# EAGLE board Reserve_nutzen (EAGLE 6.5.0)
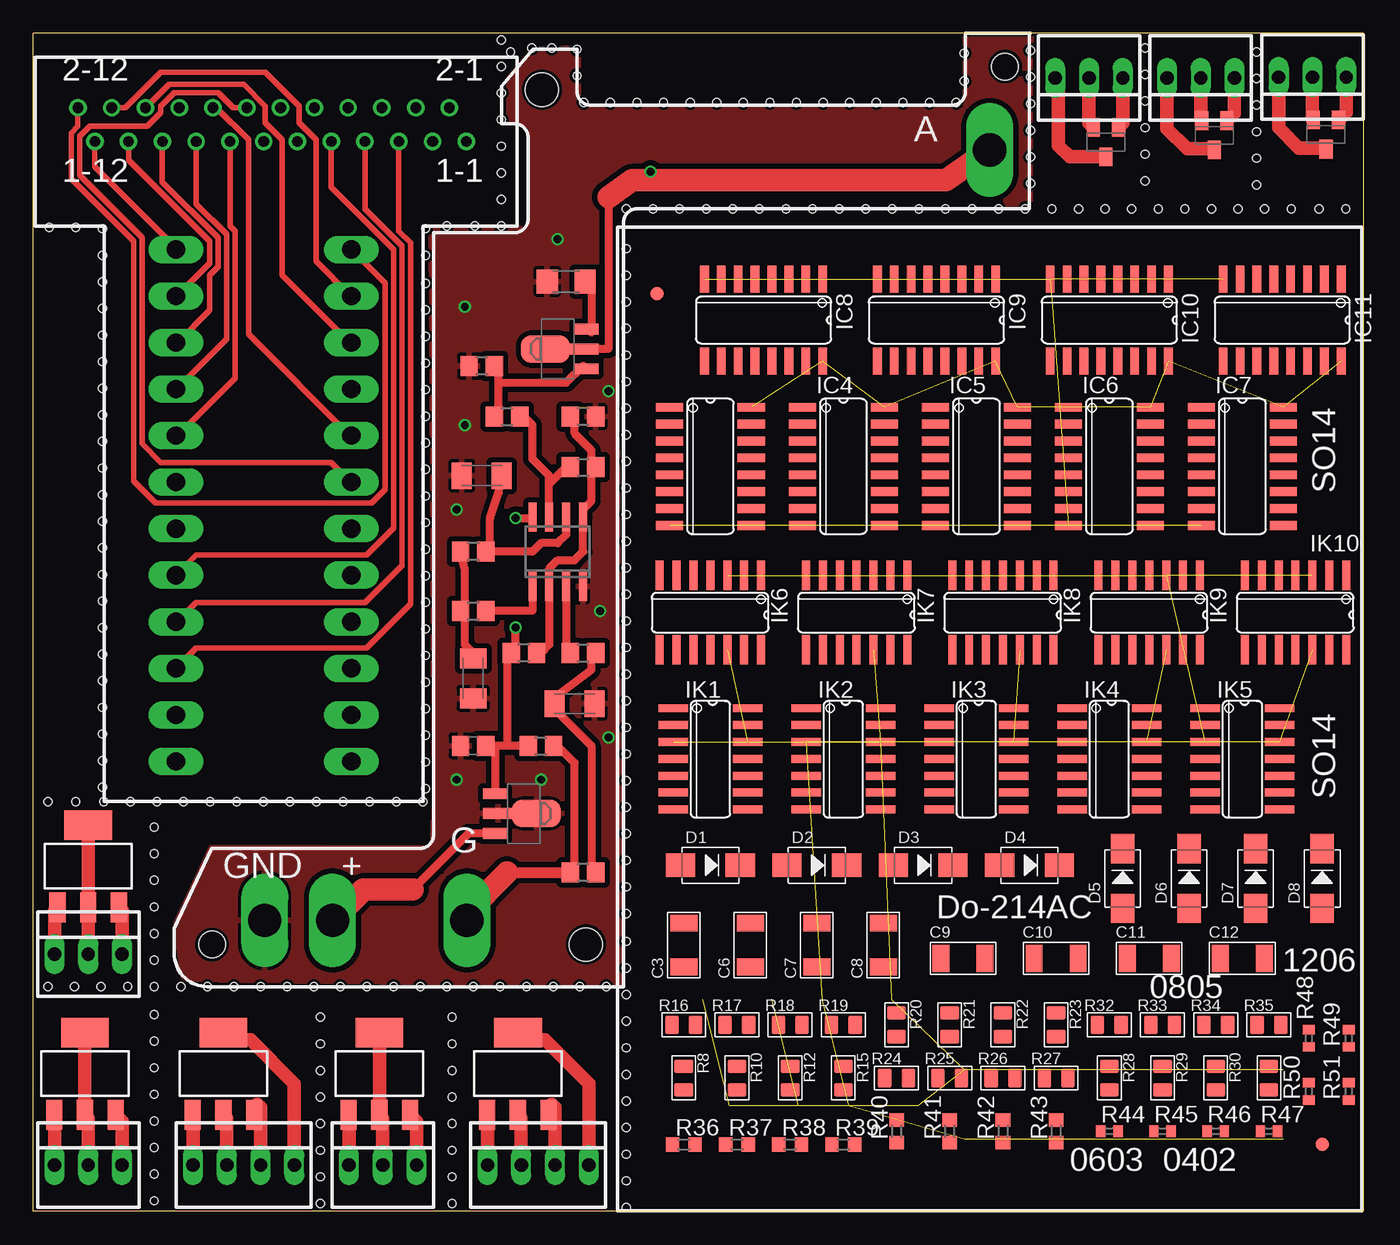
[diagram p0: board, top side]
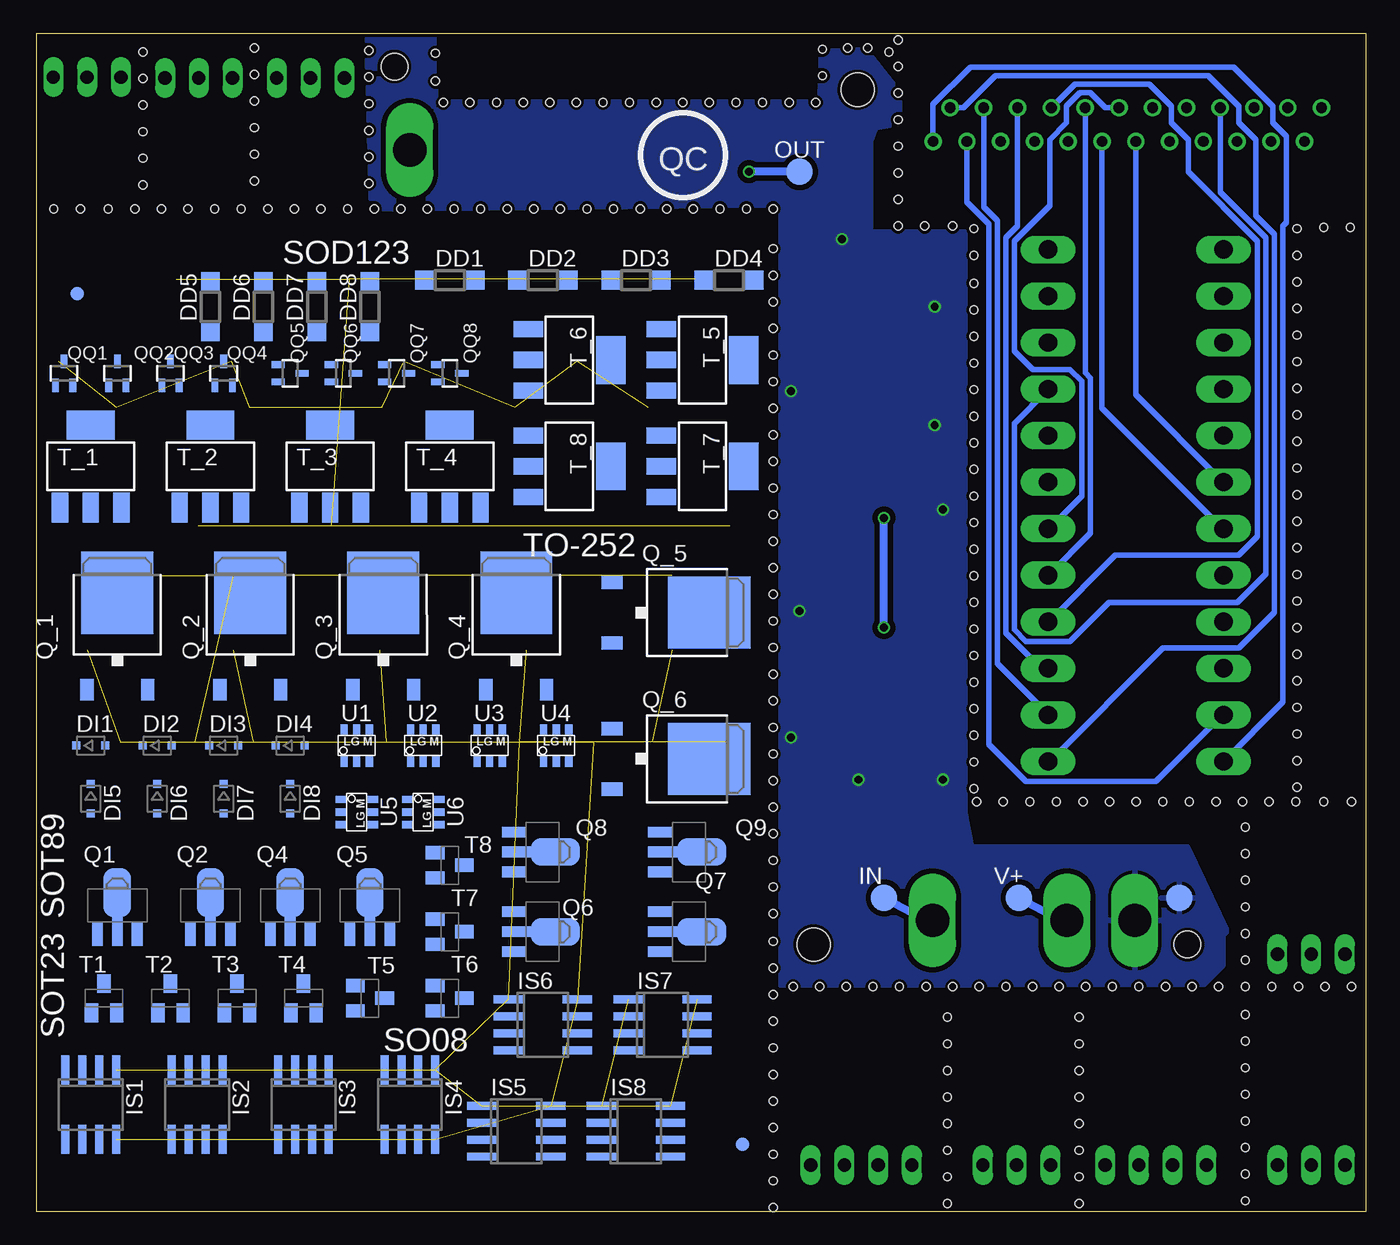
[diagram p1: board, bottom side, seen from below]

Size 100 x 88.6 mm. Coordinates in mm from the lower left corner, seen from the top.
Outline: 100,88.6 100,0 0,0 0,88.6 100,88.6
Copper layers (1*16): Top 0.035mm / dielectric 1.5mm / Bottom 0.035mm
Design rules "SeeedStudio_2layer_DRU_no_angle_20140221 *": minimum track width 24mil, minimum drill 12mil, track to track 0.4mm, track to pad 0.4mm, pad to pad 0.4mm, via to via 0.4mm, smd to smd 0mil, copper to edge 10mil, drill to drill 10mil, minimum pad ring 10mil, minimum via ring 6mil, stop-mask expansion 2mil, vias tented up to drill 100mil, thermal gap 10mil
Holes 2.5 mm at 41.56,20.07 38.25,84.35
Holes 2 mm at 73.08,86.09 13.44,20.07
Holes 0.6 mm at 5.2,31.9 5.2,33.9 5.2,35.9 5.2,37.9 5.2,39.9 5.2,41.9 5.2,43.9 5.2,45.9 5.2,47.9 5.2,49.9 5.2,51.9 5.2,53.9 5.2,55.9 5.2,57.9 5.2,59.9 5.2,61.9 5.2,63.9 5.2,65.9 5.2,67.9 5.2,69.9 5.2,71.9 5.2,73.9 44.6,75.4 46.6,75.4 48.6,75.4 50.6,75.4 52.6,75.4 54.6,75.4 56.6,75.4 58.6,75.4 60.6,75.4 62.6,75.4 64.6,75.4 66.6,75.4 68.6,75.4 70.6,75.4 72.6,75.4 74.6,75.4 76.6,75.4 78.6,75.4 80.6,75.4 82.6,75.4 84.6,75.4 86.6,75.4 88.6,75.4 90.6,75.4 92.6,75.4 94.6,75.4 96.7,75.4 98.7,75.4 41.4,83.4 43.4,83.4 45.4,83.4 47.4,83.4 49.4,83.4 51.4,83.4 53.4,83.4 55.4,83.4 57.4,83.4 59.4,83.4 61.4,83.4 63.4,83.4 65.4,83.4 67.4,83.4 69.4,83.4 31.5,0.6 31.5,2.6 31.5,4.6 31.5,6.6 31.5,8.6 31.5,10.6 31.5,12.6 31.5,14.6 44.6,0.3 44.6,2.3 44.6,4.3 44.6,6.3 44.6,8.3 44.6,10.3 44.6,12.3 44.6,14.3 44.6,16.3 44.6,18.3 44.6,20.3 44.6,22.4 44.6,24.4 44.6,26.4 44.6,28.4 44.6,30.4 44.6,32.4 44.6,34.4 44.6,36.4 44.6,38.4 44.6,40.4 44.6,42.4 44.6,44.4 44.6,46.4 44.6,48.4 44.6,50.4 44.6,52.4 44.6,54.4 44.6,56.4 44.6,58.4 44.6,60.4 44.6,62.4 44.6,64.4 44.6,66.4 44.6,68.4 44.6,70.4 44.6,72.4 1.1,16.9 3.1,16.9 5.1,16.9 7.1,16.9 9.1,16.9 11.1,16.9 13.1,16.9 15.1,16.9 17.1,16.9 19.1,16.9 21.1,16.9 23.1,16.9 25.1,16.9 27.1,16.9 29.1,16.9 31.1,16.9 33.1,16.9 35.1,16.9 37.1,16.9 39.1,16.9 41.1,16.9 43.1,16.9 5.3,30.8 7.3,30.8 9.3,30.8 11.3,30.8 13.3,30.8 15.3,30.8 17.3,30.8 19.3,30.8 21.3,30.8 23.3,30.8 25.3,30.8 27.3,30.8 29.3,30.8 29.5,31.8 29.5,33.8 29.5,35.8 29.5,37.8 29.5,39.8 29.5,41.8 29.5,43.8 29.5,45.8 29.5,47.8 29.5,49.8 29.5,51.8 29.5,53.8 29.5,55.8 29.5,57.8 29.5,59.8 29.5,61.8 29.5,63.8 29.5,65.8 29.5,67.8 29.5,69.8 29.5,71.9 29.5,73.9 35.2,74.1 35.2,76.1 35.2,78.1 35.2,80.1 35.2,82.1 35.2,84.1 35.2,86.1 35.2,88.1 1.2,74 3.2,74 21.6,0.6 21.6,2.6 21.6,4.6 21.6,6.6 21.6,8.6 21.6,10.6 21.6,12.6 21.6,14.6 9.1,0.8 9.1,2.8 9.1,4.8 9.1,6.8 9.1,8.8 9.1,10.8 9.1,12.8 9.1,14.8 9.1,18.9 9.1,20.9 9.1,22.9 9.1,24.9 9.1,26.9 9.1,28.9 3.2,30.8 1.1,30.8 83.6,77.5 83.6,79.5 83.6,81.5 83.6,83.5 83.6,85.5 83.6,87.5 92,77.2 92,79.2 92,81.2 92,83.2 92,85.2 92,87.2 75,77.3 75,79.3 75,81.3 75,83.3 75,85.3 75,87.3 70,85 70,87.1 40.9,85.4 40.9,87.4 39,87.5 37.5,87.5 35.9,87.2 33.2,74.1 31.1,74.1

## Footprints (pad centres in the part's own frame; a part is rotated, then mirrored left to right if it is on the bottom)
ID2.5MM = drill 2.5 long: P$1 0,0
C1206K = smd 1.5 x 2: 1 -1.5,0; 2 1.5,0
C1206 = smd 1.27 x 2.032: 1 -1.651,0; 2 1.651,0
C0805 = smd 1.3 x 1.5: 1 -0.95,0; 2 0.95,0
DO-214AC = smd 2.2 x 1.77: 1 -2.242,0; 2 2.242,0
SOD123 = smd 1.4 x 1.4: A 1.9,0; C -1.9,0
SOD323-R = smd 0.6 x 0.6: A 1.1,0; C -1.1,0
FIDUCIAL_1MM = smd 1 x 1: 1 0,0
B2.0 = smd 2 x 2: TP 0,0
SO08 = smd 0.6 x 2.2: 1 -1.905,-2.6; 2 -0.635,-2.6; 3 0.635,-2.6; 4 1.905,-2.6; 5 1.905,2.6; 6 0.635,2.6; 7 -0.635,2.6; 8 -1.905,2.6
SOT89_ROUND = smd 0.8 x 1.8: 1 -1.499,-2.181; 3 1.499,-2.181 | smd 0.8 x 2.3: 2 0,-1.927 | smd 2.032 x 3.65: 2@1 0,0.94
SO16 = smd 0.66 x 2.032: 1 -4.445,-3.073; 2 -3.175,-3.073; 3 -1.905,-3.073; 4 -0.635,-3.073; 5 0.635,-3.073; 6 1.905,-3.073; 7 3.175,-3.073; 8 4.445,-3.073; 9 4.445,3.073; 10 3.175,3.073; 11 1.905,3.073; 12 0.635,3.073; 13 -0.635,3.073; 14 -1.905,3.073; 15 -3.175,3.073; 16 -4.445,3.073
SO14 = smd 0.6 x 2.2: 1 -3.81,-2.8; 2 -2.54,-2.8; 3 -1.27,-2.8; 4 0,-2.8; 5 1.27,-2.8; 6 2.54,-2.8; 7 3.81,-2.8; 8 3.81,2.8; 9 2.54,2.8; 10 1.27,2.8; 11 0,2.8; 12 -1.27,2.8; 13 -2.54,2.8; 14 -3.81,2.8
SOT89 = smd 0.8 x 1.8: 1 -1.499,-2.181; 3 1.499,-2.181 | smd 0.8 x 2.3: 2 0,-1.927 | smd 2.032 x 3.65: 2@1 0,0.94
SOT223 = smd 1.219 x 2.235: 1 -2.311,-3.099; 2 0,-3.099; 3 2.311,-3.099 | smd 3.6 x 2.2: 4 0,3.099
SOT23-BEC = smd 1 x 1.4: B -0.95,-1.1; C 0,1.1; E 0.95,-1.1
TO252 = smd 1 x 1.6: 1 -2.28,-4.8; 2 2.28,-4.8 | smd 5.4 x 6.2: 3 0,2.5
SOT323 = smd 0.5 x 1: 1 0,0.9; 2 -0.65,-0.9; 3 0.65,-0.9
R0805 = smd 1.3 x 1.5: 1 -0.95,0; 2 0.95,0
R1206 = smd 1.6 x 1.803: 1 -1.422,0; 2 1.422,0
R0805' = smd 1.397 x 1.016: 1 0,0.889; 2 0,-0.889
R0603 = smd 1 x 1.1: 1 -0.85,0; 2 0.85,0
R0402 = smd 0.7 x 0.9: 1 -0.65,0; 2 0.65,0
SOT457R_PHILIPS = smd 0.55 x 0.8: 1 -0.95,-1.2; 2 0,-1.2; 3 0.95,-1.2; 4 0.95,1.2; 5 0,1.2; 6 -0.95,1.2
24-PIN-TESTADAPTER = drill 1.37 long: P$1-1 6.6,19.25; P$1-2 6.6,15.75; P$1-3 6.6,12.25; P$1-4 6.6,8.75; P$1-5 6.6,5.25; P$1-6 6.6,1.75; P$1-7 6.6,-1.75; P$1-8 6.6,-5.25; P$1-9 6.6,-8.75; P$1-10 6.6,-12.25; P$1-11 6.6,-15.75; P$1-12 6.6,-19.25; P$2-1 -6.6,19.25; P$2-2 -6.6,15.75; P$2-3 -6.6,12.25; P$2-4 -6.6,8.75; P$2-5 -6.6,5.25; P$2-6 -6.6,1.75; P$2-7 -6.6,-1.75; P$2-8 -6.6,-5.25; P$2-9 -6.6,-8.75; P$2-10 -6.6,-12.25; P$2-11 -6.6,-15.75; P$2-12 -6.6,-19.25
24-PIN-ANSCHLUSS = drill 0.8: P$1-1 0,0; P$1-2 2.54,0; P$1-3 5.08,0; P$1-4 7.62,0; P$1-5 10.16,0; P$1-6 12.7,0; P$1-7 15.24,0; P$1-8 17.78,0; P$1-9 20.32,0; P$1-10 22.86,0; P$1-11 25.4,0; P$1-12 27.94,0; P$2-1 1.27,-2.54; P$2-2 3.81,-2.54; P$2-3 6.35,-2.54; P$2-4 8.89,-2.54; P$2-5 11.43,-2.54; P$2-6 13.97,-2.54; P$2-7 16.51,-2.54; P$2-8 19.05,-2.54; P$2-9 21.59,-2.54; P$2-10 24.13,-2.54; P$2-11 26.67,-2.54; P$2-12 29.21,-2.54
22-23-2031 = drill 1 long: 1 -2.54,0; 2 0,0; 3 2.54,0
22-23-2041 = drill 1 long: 1 -3.81,0; 2 -1.27,0; 3 1.27,0; 4 3.81,0

## Placement (x,y rotation side)
+  SOCKET  [ID2.5MM]  22.51,21.89 90 top
A  SOCKET  [ID2.5MM]  71.93,79.82 90 top
C1  (100u)  [C1206K]  33.09,40.08 270 top
C2  100u  [C1206K]  40.71,38.18 0 top
C3  100u  [C1206]  48.92,20.03 90 top
C4  100nF  [C0805]  33.09,35 180 top
C5  100u  [C1206K]  33.73,55.32 180 top
C6  100u  [C1206]  53.92,20.03 90 top
C7  100u  [C1206]  58.92,20.03 90 top
C8  100u  [C1206]  63.92,20.03 90 top
C9  100u  [C1206]  69.92,19.03 0 top
C10  100u  [C1206]  76.92,19.03 0 top
C11  100u  [C1206]  83.92,19.03 0 top
C12  100u  [C1206]  90.92,19.03 0 top
D1  1N4007  [DO-214AC]  50.92,26.03 0 top
D2  1N4007  [DO-214AC]  58.92,26.03 0 top
D3  1N4007  [DO-214AC]  66.92,26.03 0 top
D4  1N4007  [DO-214AC]  74.92,26.03 0 top
D5  1N4007  [DO-214AC]  81.92,25.03 90 top
D6  1N4007  [DO-214AC]  86.92,25.03 90 top
D7  1N4007  [DO-214AC]  91.92,25.03 90 top
D8  1N4007  [DO-214AC]  96.92,25.03 90 top
DD1  [SOD123]  68.92,70.03 0 bottom
DD2  [SOD123]  61.92,70.03 0 bottom
DD3  [SOD123]  54.92,70.03 0 bottom
DD4  [SOD123]  47.92,70.03 0 bottom
DD5  [SOD123]  86.92,68.03 90 bottom
DD6  [SOD123]  82.92,68.03 90 bottom
DD7  [SOD123]  78.92,68.03 90 bottom
DD8  [SOD123]  74.92,68.03 90 bottom
DI1  [SOD323-R]  95.92,35.03 0 bottom
DI2  [SOD323-R]  90.92,35.03 0 bottom
DI3  [SOD323-R]  85.92,35.03 0 bottom
DI4  [SOD323-R]  80.92,35.03 0 bottom
DI5  [SOD323-R]  95.92,31.03 270 bottom
DI6  [SOD323-R]  90.92,31.03 270 bottom
DI7  [SOD323-R]  85.92,31.03 270 bottom
DI8  [SOD323-R]  80.92,31.03 270 bottom
FID1_  FID2  [FIDUCIAL_1MM]  46.92,69.03 0 top
FID2  FID1  [FIDUCIAL_1MM]  96.92,5.03 0 top
FID3_  FIDUCIAL  [FIDUCIAL_1MM]  96.92,69.03 0 bottom
FID4  FIDUCIAL  [FIDUCIAL_1MM]  46.92,5.03 0 bottom
G  SOCKET  [ID2.5MM]  32.61,21.89 90 top
GND  SOCKET  [ID2.5MM]  17.41,21.89 90 top
GND_  TPSB2.0  [B2.0]  14.04,23.57 0 bottom
IC1  LM2904  [SO08]  39.44,49.61 0 top
IC2  70L06  [SOT89_ROUND]  36.9,29.92 270 top
IC3  4028  [SO16]  50.92,56.03 270 top
IC4  4028  [SO16]  60.92,56.03 270 top
IC5  4028  [SO16]  70.92,56.03 270 top
IC6  4028  [SO16]  80.92,56.03 270 top
IC7  4028  [SO16]  90.92,56.03 270 top
IC8  4028  [SO16]  54.92,67.03 180 top
IC9  4028  [SO16]  67.92,67.03 180 top
IC10  4028  [SO16]  80.92,67.03 180 top
IC11  4028  [SO16]  93.92,67.03 180 top
IK1  LM339  [SO14]  50.92,34.03 270 top
IK2  LM339  [SO14]  60.92,34.03 270 top
IK3  LM339  [SO14]  70.92,34.03 270 top
IK4  LM339  [SO14]  80.92,34.03 270 top
IK5  LM339  [SO14]  90.92,34.03 270 top
IK6  LM339  [SO14]  50.92,45.03 180 top
IK7  LM339  [SO14]  61.92,45.03 180 top
IK8  LM339  [SO14]  72.92,45.03 180 top
IK9  LM339  [SO14]  83.92,45.03 180 top
IK10  LM339  [SO14]  94.92,45.03 180 top
IN  TPSB2.0  [B2.0]  36.27,23.57 0 bottom
IS1  555  [SO08]  95.92,8.03 180 bottom
IS2  555  [SO08]  87.92,8.03 180 bottom
IS3  555  [SO08]  79.92,8.03 180 bottom
IS4  555  [SO08]  71.92,8.03 180 bottom
IS5  555  [SO08]  63.92,6.03 270 bottom
IS6  555  [SO08]  61.92,14.03 270 bottom
IS7  555  [SO08]  52.92,14.03 270 bottom
IS8  555  [SO08]  54.92,6.03 270 bottom
OUT  TPSB2.0  [B2.0]  42.62,78.19 0 bottom
Q1  MY  [SOT89]  93.92,23.03 0 bottom
Q2  MY  [SOT89]  86.92,23.03 0 bottom
Q3  MY  [SOT89]  39.44,64.85 90 top
Q4  MY  [SOT89]  80.92,23.03 0 bottom
Q5  MY  [SOT89]  74.92,23.03 0 bottom
Q6  MY  [SOT89]  61.92,21.03 270 bottom
Q7  MY  [SOT89]  50.92,21.03 270 bottom
Q8  MY  [SOT89]  61.92,27.03 270 bottom
Q9  MY  [SOT89]  50.92,27.03 270 bottom
Q49  BCP53T1  [SOT223]  26.03,10.35 0 top
Q50  BSP452T1  [SOT223]  36.45,10.35 0 top
Q51  BC818-16SMD  [SOT23-BEC]  88.81,80.92 180 top
Q52  BCP53T1  [SOT223]  4.14,25.95 0 top
Q54  BC818-16SMD  [SOT23-BEC]  80.66,80.41 180 top
Q55  BCP53T1  [SOT223]  3.89,10.35 0 top
Q56  BSP452T1  [SOT223]  14.3,10.35 0 top
Q57  BC818-16SMD  [SOT23-BEC]  97.21,80.98 180 top
Q_1  SPD30P06PTO252  [TO252]  93.92,44.03 0 bottom
Q_2  SPD30P06PTO252  [TO252]  83.92,44.03 0 bottom
Q_3  SPD30P06PTO252  [TO252]  73.92,44.03 0 bottom
Q_4  SPD30P06PTO252  [TO252]  63.92,44.03 0 bottom
Q_5  SPD30P06PTO252  [TO252]  51.92,45.03 270 bottom
Q_6  SPD30P06PTO252  [TO252]  51.92,34.03 270 bottom
QQ1  SOT323  [SOT323]  97.92,63.03 0 bottom
QQ2  SOT323  [SOT323]  93.92,63.03 0 bottom
QQ3  SOT323  [SOT323]  89.92,63.03 0 bottom
QQ4  SOT323  [SOT323]  85.92,63.03 0 bottom
QQ5  SOT323  [SOT323]  80.92,63.03 270 bottom
QQ6  SOT323  [SOT323]  76.92,63.03 270 bottom
QQ7  SOT323  [SOT323]  72.92,63.03 270 bottom
QQ8  SOT323  [SOT323]  68.92,63.03 270 bottom
R1  10k  [R0805]  38.17,35 0 top
R2  4k7  [R0805]  35.63,59.77 0 top
R3  13  [R1206]  40.08,69.93 180 top
R4  100k  [R0805]  33.09,45.16 0 top
R5  100k  [R0805]  41.34,25.48 180 top
R6  10k  [R0805]  41.34,41.99 0 top
R7  2k2  [R0805]  33.73,63.58 180 top
R8  4701  [R0805']  48.92,10.03 0 top
R9  100k  [R0805]  33.09,49.61 180 top
R10  4701  [R0805']  52.92,10.03 0 top
R11  10k  [R0805]  36.9,41.99 180 top
R12  4701  [R0805']  56.92,10.03 0 top
R13  10k  [R0805]  41.34,59.77 180 top
R14  2.2k  [R0805]  41.34,55.96 0 top
R15  4701  [R0805']  60.92,10.03 0 top
R16  4701  [R0805']  48.92,14.03 90 top
R17  4701  [R0805']  52.92,14.03 90 top
R18  4701  [R0805']  56.92,14.03 90 top
R19  4701  [R0805']  60.92,14.03 90 top
R20  4701  [R0805']  64.92,14.03 0 top
R21  4701  [R0805']  68.92,14.03 0 top
R22  4701  [R0805']  72.92,14.03 0 top
R23  4701  [R0805']  76.92,14.03 0 top
R24  4701  [R0805']  64.92,10.03 90 top
R25  4701  [R0805']  68.92,10.03 90 top
R26  4701  [R0805']  72.92,10.03 90 top
R27  4701  [R0805']  76.92,10.03 90 top
R28  4701  [R0805']  80.92,10.03 0 top
R29  4701  [R0805']  84.92,10.03 0 top
R30  4701  [R0805']  88.92,10.03 0 top
R31  4701  [R0805']  92.92,10.03 0 top
R32  4701  [R0805']  80.92,14.03 90 top
R33  4701  [R0805']  84.92,14.03 90 top
R34  4701  [R0805']  88.92,14.03 90 top
R35  4701  [R0805']  92.92,14.03 90 top
R36  [R0603]  48.92,5.03 0 top
R37  [R0603]  52.92,5.03 0 top
R38  [R0603]  56.92,5.03 0 top
R39  [R0603]  60.92,5.03 0 top
R40  [R0603]  64.92,6.03 90 top
R41  [R0603]  68.92,6.03 90 top
R42  [R0603]  72.92,6.03 90 top
R43  [R0603]  76.92,6.03 90 top
R44  [R0402]  80.92,6.03 0 top
R45  [R0402]  84.92,6.03 0 top
R46  [R0402]  88.92,6.03 0 top
R47  [R0402]  92.92,6.03 0 top
R48  [R0402]  95.92,13.03 90 top
R49  [R0402]  98.92,13.03 90 top
R50  [R0402]  95.92,9.03 90 top
R51  [R0402]  98.92,9.03 90 top
T1  J1  [SOT23-BEC]  94.92,16.03 0 bottom
T2  J1  [SOT23-BEC]  89.92,16.03 0 bottom
T3  J1  [SOT23-BEC]  84.92,16.03 0 bottom
T4  J1  [SOT23-BEC]  79.92,16.03 0 bottom
T5  J1  [SOT23-BEC]  74.92,16.03 270 bottom
T6  J1  [SOT23-BEC]  68.92,16.03 270 bottom
T7  J1  [SOT23-BEC]  68.92,21.03 270 bottom
T8  J1  [SOT23-BEC]  68.92,26.03 270 bottom
T_1  SOT223  [SOT223]  95.92,56.03 0 bottom
T_2  SOT223  [SOT223]  86.92,56.03 0 bottom
T_3  SOT223  [SOT223]  77.92,56.03 0 bottom
T_4  SOT223  [SOT223]  68.92,56.03 0 bottom
T_5  SOT223  [SOT223]  49.92,64.03 270 bottom
T_6  SOT223  [SOT223]  59.92,64.03 270 bottom
T_7  SOT223  [SOT223]  49.92,56.03 270 bottom
T_8  SOT223  [SOT223]  59.92,56.03 270 bottom
U1  NUP4304SOT457_R  [SOT457R_PHILIPS]  75.92,35.03 0 bottom
U2  NUP4304SOT457_R  [SOT457R_PHILIPS]  70.92,35.03 0 bottom
U3  NUP4304SOT457_R  [SOT457R_PHILIPS]  65.92,35.03 0 bottom
U4  NUP4304SOT457_R  [SOT457R_PHILIPS]  60.92,35.03 0 bottom
U5  NUP4304SOT457_R  [SOT457R_PHILIPS]  75.92,30.03 270 bottom
U6  NUP4304SOT457_R  [SOT457R_PHILIPS]  70.92,30.03 270 bottom
U$1  TESTADAPTER-24P  [24-PIN-TESTADAPTER]  17.33,53.09 180 top
U$3  TESTADAPTER-24P24-PIN-ANSCHLUSS  [24-PIN-ANSCHLUSS]  32.57,80.46 180 top
V+  TPSB2.0  [B2.0]  26.1,23.57 0 bottom
X68  22-23-2031  [22-23-2031]  26.29,3.5 0 top
X69  22-23-2041  [22-23-2041]  37.97,3.5 0 top
X70  22-23-2031  [22-23-2031]  87.79,85.24 180 top
X75  22-23-2031  [22-23-2031]  4.14,19.35 0 top
X77  22-23-2031  [22-23-2031]  79.39,85.23 180 top
X78  22-23-2031  [22-23-2031]  4.14,3.5 0 top
X79  22-23-2041  [22-23-2041]  15.82,3.5 0 top
X80  22-23-2031  [22-23-2031]  96.19,85.3 180 top

## Library data of the parts
+ A G GND = Brotbox_Socket_Header
C1 C2 C4 C5 R1-R7 R9 R11 R13 R14 R36-R51 = rcl
C3 C6-C12 = Seeed-Capacitor-2016; MPN: GRM31CR60J107ME39L
D1-D8 = Diode-do214ac; MPN: 1N4007
DD1-DD8 DI1-DI8 = diode
FID1_ FID2 FID3_ FID4 = Fiducial
GND_ IN OUT V+ = testpin_BMW
IC1 = linear_BMW
IC2 = 78LXX
IC3-IC11 = 4028
IK1-IK10 = LM339
IS1-IS8 = linear
Q1-Q9 = Transistor_SOT89
Q49 Q52 Q55 = BCP53_
Q50 Q56 = BSP452
Q51 Q54 Q57 = transistor-npn
Q_1-Q_6 = transistor-fet
QQ1-QQ8 = zetex; MPN: DSS4160U-7; OC_FARNELL: 1710696; OC_NEWARK: 25R4558
R8 R10 R12 R15-R35 = Seeed-Resistor-2016; MPN: RC0805JR-074K7L
T1-T8 = transistor
T_1-T_8 = zetex_nmos_BSP78; OC_FARNELL: unknown; OC_NEWARK: unknown
U1-U6 = NUP4304_ESD_Diode_Array
U$1 U$3 = con WAGO BMW
X68 X70 X75 X77 X78 X80 = con-molex; MF: MOLEX; MPN: 22-23-2031; OC_FARNELL: 1462950; OC_NEWARK: 30C0862
X69 X79 = con-molex; MF: MOLEX; MPN: 22-23-2041; OC_FARNELL: 1462920; OC_NEWARK: 38C0355

## Nets
+12V: +.P$1 IC2.3 V+.TP
GND: C1.2 C2.2 C4.2 C5.2 GND.P$1 GND_.TP IC1.4 IC2.2 IC2.2@1 R3.2 R7.2 R13.1
GND1: IK1.12 IK2.12 IK3.12 IK4.12 IK5.12 IK6.12 IK7.12 IK8.12 IK9.12 IK10.12 IS1.1 IS2.1 IS3.1 IS4.1 IS5.1 IS6.1 IS7.1 IS8.1
N$1: C2.1 R5.1 R6.2
N$2: Q3.1 R2.1 R7.1
N$3: C1.1 R4.1 R9.2
N$4: C5.1 IC1.6 R9.1
N$5: IC1.2 IC1.5 R11.1 R13.2 R14.2
N$6: G.P$1 IN.TP R1.2 R5.2
N$7: Q3.3 R3.1
N$9: IC1.3 R6.1
N$10: IC1.7 R2.2 R14.1
N$11: A.P$1 OUT.TP Q3.2
N$20: U$1.P$2-1 U$3.P$2-1
N$21: U$1.P$2-2 U$3.P$2-2
N$22: U$1.P$2-3 U$3.P$2-3
N$23: U$1.P$2-4 U$3.P$2-4
N$24: U$1.P$2-5 U$3.P$2-5
N$25: U$1.P$2-6 U$3.P$2-6
N$26: U$1.P$2-7 U$3.P$2-7
N$27: U$1.P$2-8 U$3.P$2-8
N$28: U$1.P$2-9 U$3.P$2-9
N$29: U$1.P$2-10 U$3.P$2-10
N$30: U$1.P$2-11 U$3.P$2-11
N$31: U$1.P$2-12 U$3.P$2-12
N$32: U$1.P$1-2 U$3.P$1-2
N$33: U$1.P$1-3 U$3.P$1-3
N$34: U$1.P$1-4 U$3.P$1-4
N$35: U$1.P$1-6 U$3.P$1-6
N$36: U$1.P$1-7 U$3.P$1-7
N$37: U$1.P$1-8 U$3.P$1-8
N$38: U$1.P$1-9 U$3.P$1-9
N$39: U$1.P$1-10 U$3.P$1-10
N$40: U$1.P$1-11 U$3.P$1-11
N$41: U$1.P$1-12 U$3.P$1-12
N$42: U$1.P$1-5 U$3.P$1-5
N$43: U$1.P$1-1 U$3.P$1-1
N$450: Q49.1 X68.1
N$451: Q49.2 X68.2
N$452: Q49.3 X68.3
N$453: Q50.1 X69.1
N$454: Q50.2 X69.2
N$455: Q50.3 X69.3
N$456: Q50.4 X69.4
N$457: Q51.B X70.1
N$458: Q51.E X70.2
N$459: Q51.C X70.3
N$500: Q52.1 X75.1
N$501: Q52.2 X75.2
N$502: Q52.3 X75.3
N$507: Q54.B X77.1
N$508: Q54.E X77.2
N$509: Q54.C X77.3
N$510: Q55.1 X78.1
N$511: Q55.2 X78.2
N$512: Q55.3 X78.3
N$513: Q56.1 X79.1
N$514: Q56.2 X79.2
N$515: Q56.3 X79.3
N$516: Q56.4 X79.4
N$517: Q57.B X80.1
N$518: Q57.E X80.2
N$519: Q57.C X80.3
N$580: IC1.1 R4.2
V+: IK1.3 IK2.3 IK3.3 IK4.3 IK5.3 IK6.3 IK7.3 IK8.3 IK9.3 IK10.3 IS1.8 IS2.8 IS3.8 IS4.8 IS5.8 IS6.8 IS7.8 IS8.8
VCC: C4.1 IC1.8 IC2.1 R1.1 R11.2
VDD: IC3.16 IC4.16 IC5.16 IC6.16 IC7.16 IC8.16 IC9.16 IC10.16 IC11.16
VSS: IC3.8 IC4.8 IC5.8 IC6.8 IC7.8 IC8.8 IC9.8 IC10.8 IC11.8

## Tracks (layer width: path | path; a pad name or v marks a point on that pad's centre or on a via)
+12V
  Top 0.61: IC2.3 32.73,28.43 28.52,24.21
  Top 1.676: 28.52,24.21 24.83,24.21 +.P$1
  Bottom 0.61: V+.TP 22.51,21.67 +.P$1
GND  (via drill 0.6)
  other vias: 39.44,73.1 32.45,68.02 32.45,59.13 31.82,52.78 43.25,61.67 42.62,45.16 43.25,35.64 38.17,32.46 31.82,32.46
  pour Bottom: 12.73,17.09 44.02,16.99 44.02,75.66 74.8,75.36 75.1,86.61 75.1,88.8 70.1,88.8 70.1,84.4 70,84.4 70,83.4 41.1,83.4 41,87.21 37.66,87.41 35.2,84.3 35.1,84.2 35.1,81.8 36.9,81.5 37.3,80.5 37.3,73.64 30.18,73.64 30.18,29.96 29.67,27.42 13.47,27.42 10.5,21.1 10.8,20.8 10.8,18.5 12.21,17.09
  pour Top: 15.23,17.39 44.12,17.09 43.82,75.52 75,75.52 75,87.41 75.1,88.6 75.1,88.7 70.1,88.7 70.1,83.4 69.8,83.4 69.8,83.1 41,83.1 41,87.51 37.66,87.41 35.8,85.2 35.8,82 37.4,81.6 37.4,73.94 29.91,73.74 30.18,30.76 30.04,27.32 13.43,27.42 10.7,21.6 11.3,17.49
GND1  (17 unrouted)
N$1
  Top 0.61: 39.44,38.18 39.44,37.54 41.98,35 41.98,25.48 R5.1 | 39.44,38.18 39.44,38.81 41.98,40.72 41.98,41.99 R6.2 | 39.44,38.18 C2.1
N$2
  Top 0.61: 34.99,62.31 34.99,59.77 R2.1 | 34.99,62.31 34.99,63.58 R7.1 | 34.99,62.31 40.08,62.31 41.34,63.58 Q3.1
N$3
  Top 0.61: 32.45,45.16 32.45,48.34 R9.2 | 32.45,45.16 32.45,42.62 33.09,41.99 C1.1 | 32.45,45.16 R4.1
N$4
  Top 0.61: IC1.6 40.08,50.88 39.44,50.24 38.17,50.24 37.53,49.61 R9.1 34.36,50.24 34.36,52.15 34.99,54.05 C5.1
N$5
  Top 0.61: R11.1 38.17,41.99 38.8,42.62 IC1.2 38.8,48.34 39.44,48.97 40.71,48.97 41.34,49.61 IC1.5 41.34,52.78 41.98,53.42 41.98,55.96 | 41.98,55.96 41.98,57.23 40.71,58.5 40.71,59.77 R13.2 | 41.98,55.96 R14.2
N$6
  Top 0.61: R1.2 39.44,35 40.71,33.73 40.71,25.48 R5.2
  Top 0.813: 35.63,25.48 R5.2
  Top 1.676: G.P$1 32.61,22.46 35.63,25.48
  Bottom 0.61: IN.TP 32.61,21.67 G.P$1
N$7
  Top 0.61: Q3.3 41.98,66.12 41.98,69.93 R3.1
N$9
  Top 0.61: IC1.3 40.08,41.99 R6.1
N$10
  Top 0.61: IC1.7 38.8,54.69 | 38.8,54.69 38.8,55.32 37.53,56.59 37.53,59.13 36.9,59.77 R2.2 | 38.8,54.69 40.08,55.96 R14.1
N$11  (via drill 0.6)
  Top 0.61: Q3.2 43.25,64.85 43.25,76.28 | v46.42,78.19 46.42,77.55
  Top 1.676: A.P$1 68.65,77.55 46.42,77.55 45.03,77.55 43.25,76.28
  Bottom 0.61: OUT.TP v46.42,78.19
N$20
  Bottom 0.406: U$3.P$2-1 30.28,83 27.87,85.41 11.87,85.41 9.58,83.13 9.58,81.86 8.31,80.59 8.31,74.87 6.92,73.47 6.92,45.03 9.58,42.36 15.3,42.36 23.81,33.85 U$1.P$2-1
N$21
  Bottom 0.406: U$3.P$2-2 28.76,75.51 27.74,74.49 27.74,41.22 23.93,37.41 U$1.P$2-2
N$22
  Bottom 0.406: U$3.P$2-3 26.22,74.11 27.11,73.22 27.11,43.5 24.57,40.96 23.93,40.96 U$1.P$2-3
N$23
  Bottom 0.406: U$3.P$2-4 21.9,84.78 16.31,84.78 14.66,83.13 14.66,81.86 13.39,80.59 13.39,78.17 8.19,72.97 8.19,50.74 9.58,49.34 18.85,49.34 23.81,44.39 U$1.P$2-4
N$24
  Bottom 0.406: U$3.P$2-5 21.14,63.06 20.76,62.68 20.76,51 23.81,47.95 U$1.P$2-5
N$25
  Bottom 0.406: U$3.P$2-6 19.62,83 20.76,84.14 21.52,84.14 22.54,83.13 22.54,81.86 23.81,80.59 23.81,75.63 26.47,72.97 26.47,64.71 25.08,63.31 22.28,63.31 21.39,62.43 21.39,53.79 23.81,51.38 U$1.P$2-6
N$26
  Top 0.406: U$3.P$2-7 15.04,83 13.9,84.14 10.6,84.14 9.58,83.13 9.58,82.62 8.57,81.6 4.25,81.6 3.49,80.84 3.49,77.92 8.19,73.22 8.19,57.73 9.58,56.33 22.41,56.33 23.81,54.93 U$1.P$2-7
N$27
  Top 0.406: U$3.P$2-8 13.77,83 16.19,80.59 16.19,65.98 23.81,58.36 U$1.P$2-8
N$28
  Bottom 0.406: U$3.P$2-9 10.98,76.65 7.55,73.22 7.55,47.95 9.71,45.79 19.36,45.79 22.28,42.87 25.59,42.87 26.47,43.76 26.47,59.25 23.93,61.79 U$1.P$2-9
N$29
  Top 0.406: U$3.P$2-10 10.22,84.78 15.81,84.78 17.46,83.13 17.46,81.86 18.73,80.59 18.73,70.43 23.81,65.35 U$1.P$2-10
N$30
  Top 0.406: U$3.P$2-11 6.92,83 9.58,85.67 17.46,85.67 20,83.13 20,81.86 21.27,80.59 21.27,71.44 23.81,68.9 U$1.P$2-11
N$31
  Top 0.406: U$3.P$2-12 3.36,81.6 2.85,81.09 2.85,77.67 7.55,72.97 7.55,54.93 9.2,53.28 25.46,53.28 26.47,54.3 26.47,69.79 U$1.P$2-12
N$32
  Bottom 0.406: U$3.P$1-2 30.03,75.89 28.38,74.24 28.38,35.12 25.59,32.33 15.81,32.33 10.85,37.28 U$1.P$1-2
N$33
  Top 0.406: U$3.P$1-3 27.49,73.73 28.38,72.84 28.38,45.66 25.08,42.36 12.25,42.36 U$1.P$1-3
N$34
  Top 0.406: U$3.P$1-4 24.95,75.38 27.74,72.59 27.74,48.58 24.95,45.79 12.25,45.79 10.85,44.39 U$1.P$1-4
N$35
  Bottom 0.406: U$3.P$1-6 19.87,60.39 10.85,51.38 U$1.P$1-6
N$36
  Bottom 0.406: U$3.P$1-7 17.33,61.41 10.85,54.93 U$1.P$1-7
N$37
  Top 0.406: U$3.P$1-8 14.79,74.11 15.17,73.73 15.17,62.68 10.85,58.36 U$1.P$1-8
N$38
  Top 0.406: U$3.P$1-9 12.25,75.76 14.54,73.47 14.54,65.6 10.85,61.92 U$1.P$1-9
N$39
  Top 0.406: U$3.P$1-10 9.71,77.41 13.9,73.22 13.9,71.06 13.27,70.43 13.27,67.76 10.85,65.35 U$1.P$1-10
N$40
  Top 0.406: U$3.P$1-11 7.17,79.06 13.27,72.97 13.27,71.32 10.85,68.9 U$1.P$1-11
N$41
  Top 0.406: U$3.P$1-12 4.63,78.55 10.73,72.46 U$1.P$1-12
N$42
  Top 0.406: U$3.P$1-5 22.41,77.03 27.11,72.33 27.11,51.38 25.08,49.34 12.25,49.34 10.85,47.95 U$1.P$1-5
N$43
  Bottom 0.406: U$3.P$1-1 32.57,83.25 29.78,86.05 9.96,86.05 7.04,83.13 7.04,81.86 6.03,80.84 6.03,74.36 6.28,74.11 6.28,38.3 U$1.P$1-1
N$450
  Top 1.016: X68.1 23.75,7.23 Q49.1
N$451
  Top 1.016: X68.2 26.29,7 Q49.2
N$452
  Top 1.016: X68.3 28.83,6.77 Q49.3
N$453
  Top 1.016: X69.1 34.16,7.23 Q50.1
N$454
  Top 1.016: X69.2 36.7,7 Q50.2
N$455
  Top 1.016: X69.3 39.24,7.81 38.99,8.07 38.99,7.48 Q50.3
N$456
  Top 1.016: X69.4 41.78,9.59 38.48,12.89 37.01,12.89 Q50.4
N$457
  Top 1.016: X70.1 90.33,82.6 Q51.B
N$458
  Top 1.016: X70.2 87.79,82.09 Q51.E
N$459
  Top 1.016: X70.3 85.25,81.43 86.78,79.91 88.73,79.91 Q51.C
N$500
  Top 1.016: X75.1 1.6,22.63 Q52.1
N$501
  Top 1.016: X75.2 Q52.2
N$502
  Top 1.016: X75.3 6.68,22.63 Q52.3
N$507
  Top 1.016: X77.1 81.93,81.83 Q54.B
N$508
  Top 1.016: X77.2 79.39,81.83 Q54.E
N$509
  Top 1.016: Q54.C 77.95,79.31 77.11,80.15 77.11,84.98 X77.3
N$510
  Top 1.016: X78.1 1.6,7.23 Q55.1
N$511
  Top 1.016: X78.2 4.14,7 Q55.2
N$512
  Top 1.016: X78.3 6.68,6.77 Q55.3
N$513
  Top 1.016: X79.1 12.01,7.23 Q56.1
N$514
  Top 1.016: X79.2 14.55,7 Q56.2
N$515
  Top 1.016: X79.3 17.09,7.81 16.84,8.07 16.84,7.48 Q56.3
N$516
  Top 1.016: X79.4 19.63,9.59 16.33,12.89 14.86,12.89 Q56.4
N$517
  Top 1.016: X80.1 98.73,82.65 Q57.B
N$518
  Top 1.016: X80.2 96.19,82.14 Q57.E
N$519
  Top 1.016: X80.3 93.65,81.49 95.18,79.96 97.13,79.96 Q57.C
N$533
  Top 1.016: 26.03,7.81 26.03,13.66
N$534
  Top 1.016: 4.14,23.41 4.14,28.75
N$535
  Top 1.016: 3.89,7.81 3.89,13.66
N$580
  Top 0.61: R4.2 37.53,45.16 IC1.1
V+  (17 unrouted)
VCC  (via drill 0.6)
  Top 0.61: C4.1 34.72,35 | 34.72,35 IC2.1 | R1.1 35.63,35 | 35.63,35 34.72,35 | 35.63,35 35.63,41.99 R11.2 36.27,41.99 v36.27,43.89 | v36.27,52.15 37.48,52.15 IC1.8
  Bottom 0.61: v36.27,43.89 v36.27,52.15
VDD  (8 unrouted)
VSS  (8 unrouted)

## Text on the board
bPlace: QC
tNames: SO14 | SO14 | Do-214AC | 1206 | 0805 | 0603 | 0402
bNames: SOD123 | TO-252 | SOT89 | SOT23 | SO08